# EAGLE board Keychain rev1 (EAGLE 8.1.0)
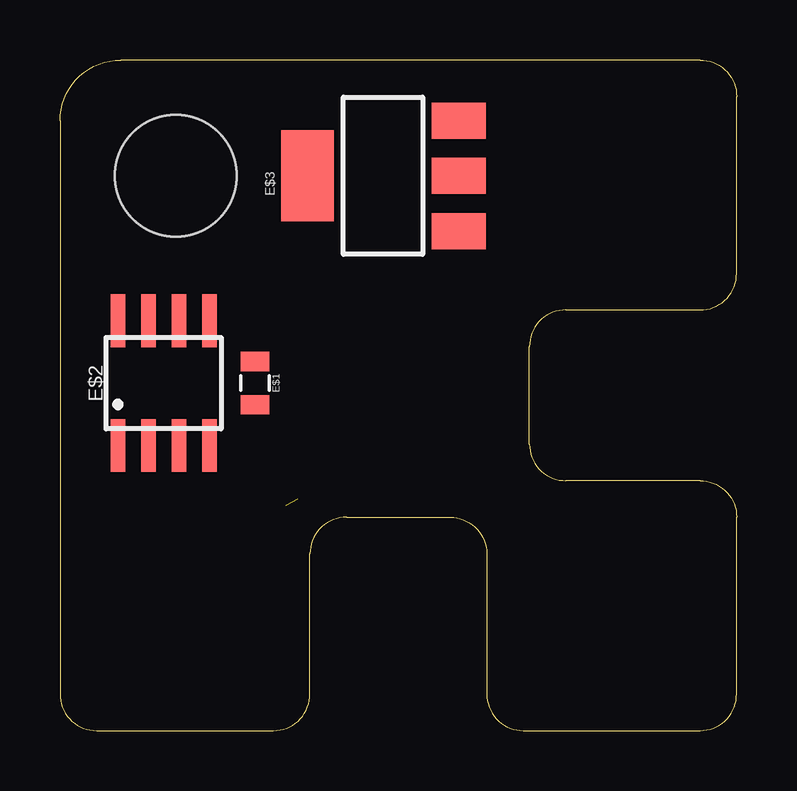
[diagram p0: board, top side]
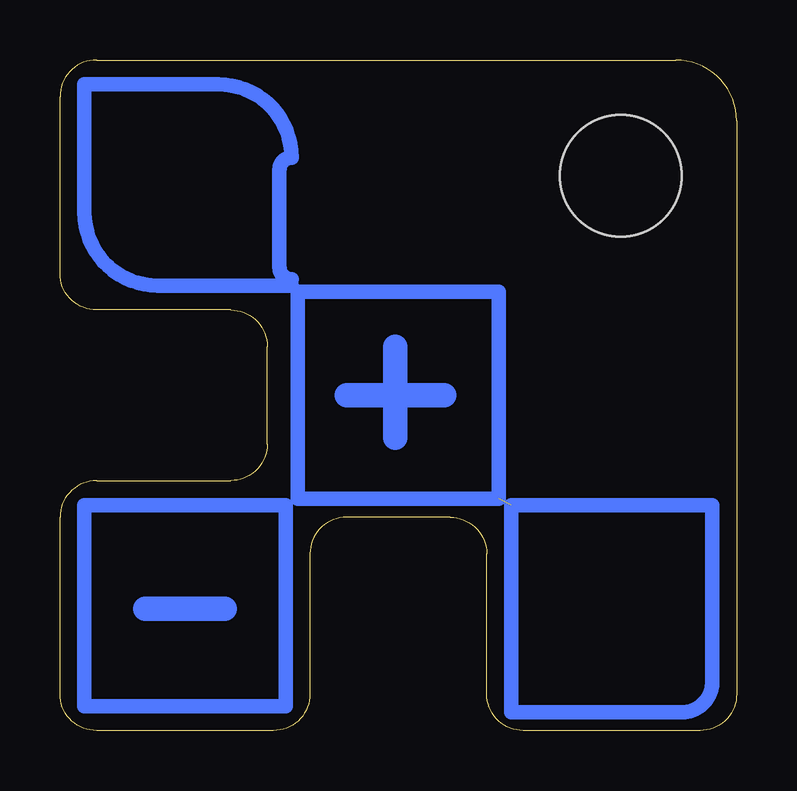
[diagram p1: board, bottom side, seen from below]

Size 28.19 x 27.94 mm. Coordinates in mm from the lower left corner, seen from the top.
Outline: 1.52,0 8.89,0 arc90 10.41,1.52 10.41,7.37 arc-90 11.94,8.89 16.26,8.89 arc-90 17.78,7.37 17.78,1.52 arc90 19.3,0 26.67,0 arc90 28.19,1.52 28.19,8.89 arc90 26.67,10.41 21.08,10.41 arc-90 19.56,11.94 19.56,16 arc-90 21.08,17.53 26.67,17.53 arc90 28.19,19.05 28.19,26.42 arc90 26.67,27.94 2.54,27.94 arc90 0,25.4 0,1.52 arc90 1.52,0
Copper layers (1*16): Top 0.035mm / dielectric 1.5mm / Bottom 0.035mm
Design rules "default": minimum track width 10mil, minimum drill 24mil, track to track 8mil, track to pad 8mil, pad to pad 8mil, via to via 8mil, smd to smd 8mil, copper to edge 40mil, drill to drill 8mil, minimum pad ring 10mil, minimum via ring 8mil, stop-mask expansion 4mil, vias tented up to drill 0mil, thermal gap 10mil
Holes 5.08 mm at 4.83,23.11

## Footprints (pad centres in the part's own frame; a part is rotated, then mirrored left to right if it is on the bottom)
0805 = smd 0.8 x 1.2: 1 -0.9,0; 2 0.9,0
SOIC-08 = smd 0.6 x 2.2: 1 -1.905,-2.6; 2 -0.635,-2.6; 3 0.635,-2.6; 4 1.905,-2.6; 5 1.905,2.6; 6 0.635,2.6; 7 -0.635,2.6; 8 -1.905,2.6
SOT223 = smd 1.5 x 2.235: 1 -2.3,-3.15; 2 0,-3.15; 3 2.3,-3.15 | smd 3.8 x 2.2: 4 0,3.15

## Placement (x,y rotation side)
E$1  [0805]  8.13,14.48 270 top
E$2  [SOIC-08]  4.32,14.48 0 top
E$3  [SOT223]  13.46,23.11 90 top

## Library data of the parts
E$1-E$3 = HyTechDevices

## Tracks (layer width: path | path; a pad name or v marks a point on that pad's centre or on a via)
S$1  (1 unrouted)
  Bottom 0.61: 18.29,18.29 9.91,18.29 9.91,9.65 | 9.4,9.4 1.02,9.4 1.02,2.03 arc90 2.29,0.76 9.4,0.76 9.4,9.4
S$2
  Bottom 0.61: 18.29,18.29 18.29,9.65 9.91,9.65
S$3
  Bottom 0.61: 18.8,9.4 27.18,9.4 27.18,1.02 18.8,1.02 18.8,9.4
S$5
  Bottom 0.61: 18.54,18.8 arc90 19.05,19.3 19.05,23.37 arc90 18.54,23.88 arc-90 21.59,26.92 27.18,26.92 27.18,21.59 arc-90 24.13,18.54 18.54,18.54
S$6
  Bottom 1.016: 14.22,12.19 14.22,16
S$7
  Bottom 1.016: 12.19,13.97 16.26,13.97
S$8
  Bottom 1.016: 21.34,5.08 24.64,5.08

## Text on the board
bDocu: HyTech Racing | Electrical Team